# Altium PCB MB1367.PcbDoc (part 2 of 6)
Units mm, origin at the board's own origin, x right, y up, seen from the top; angles counter-clockwise.
Board outline 70 x 82.5 mm, 4 copper layers (Top Layer, Signal Layer 1, Signal Layer 2, Bottom Layer), stack 1.614 mm thick; 192 components, 143 nets, 810 pads, 920 vias.
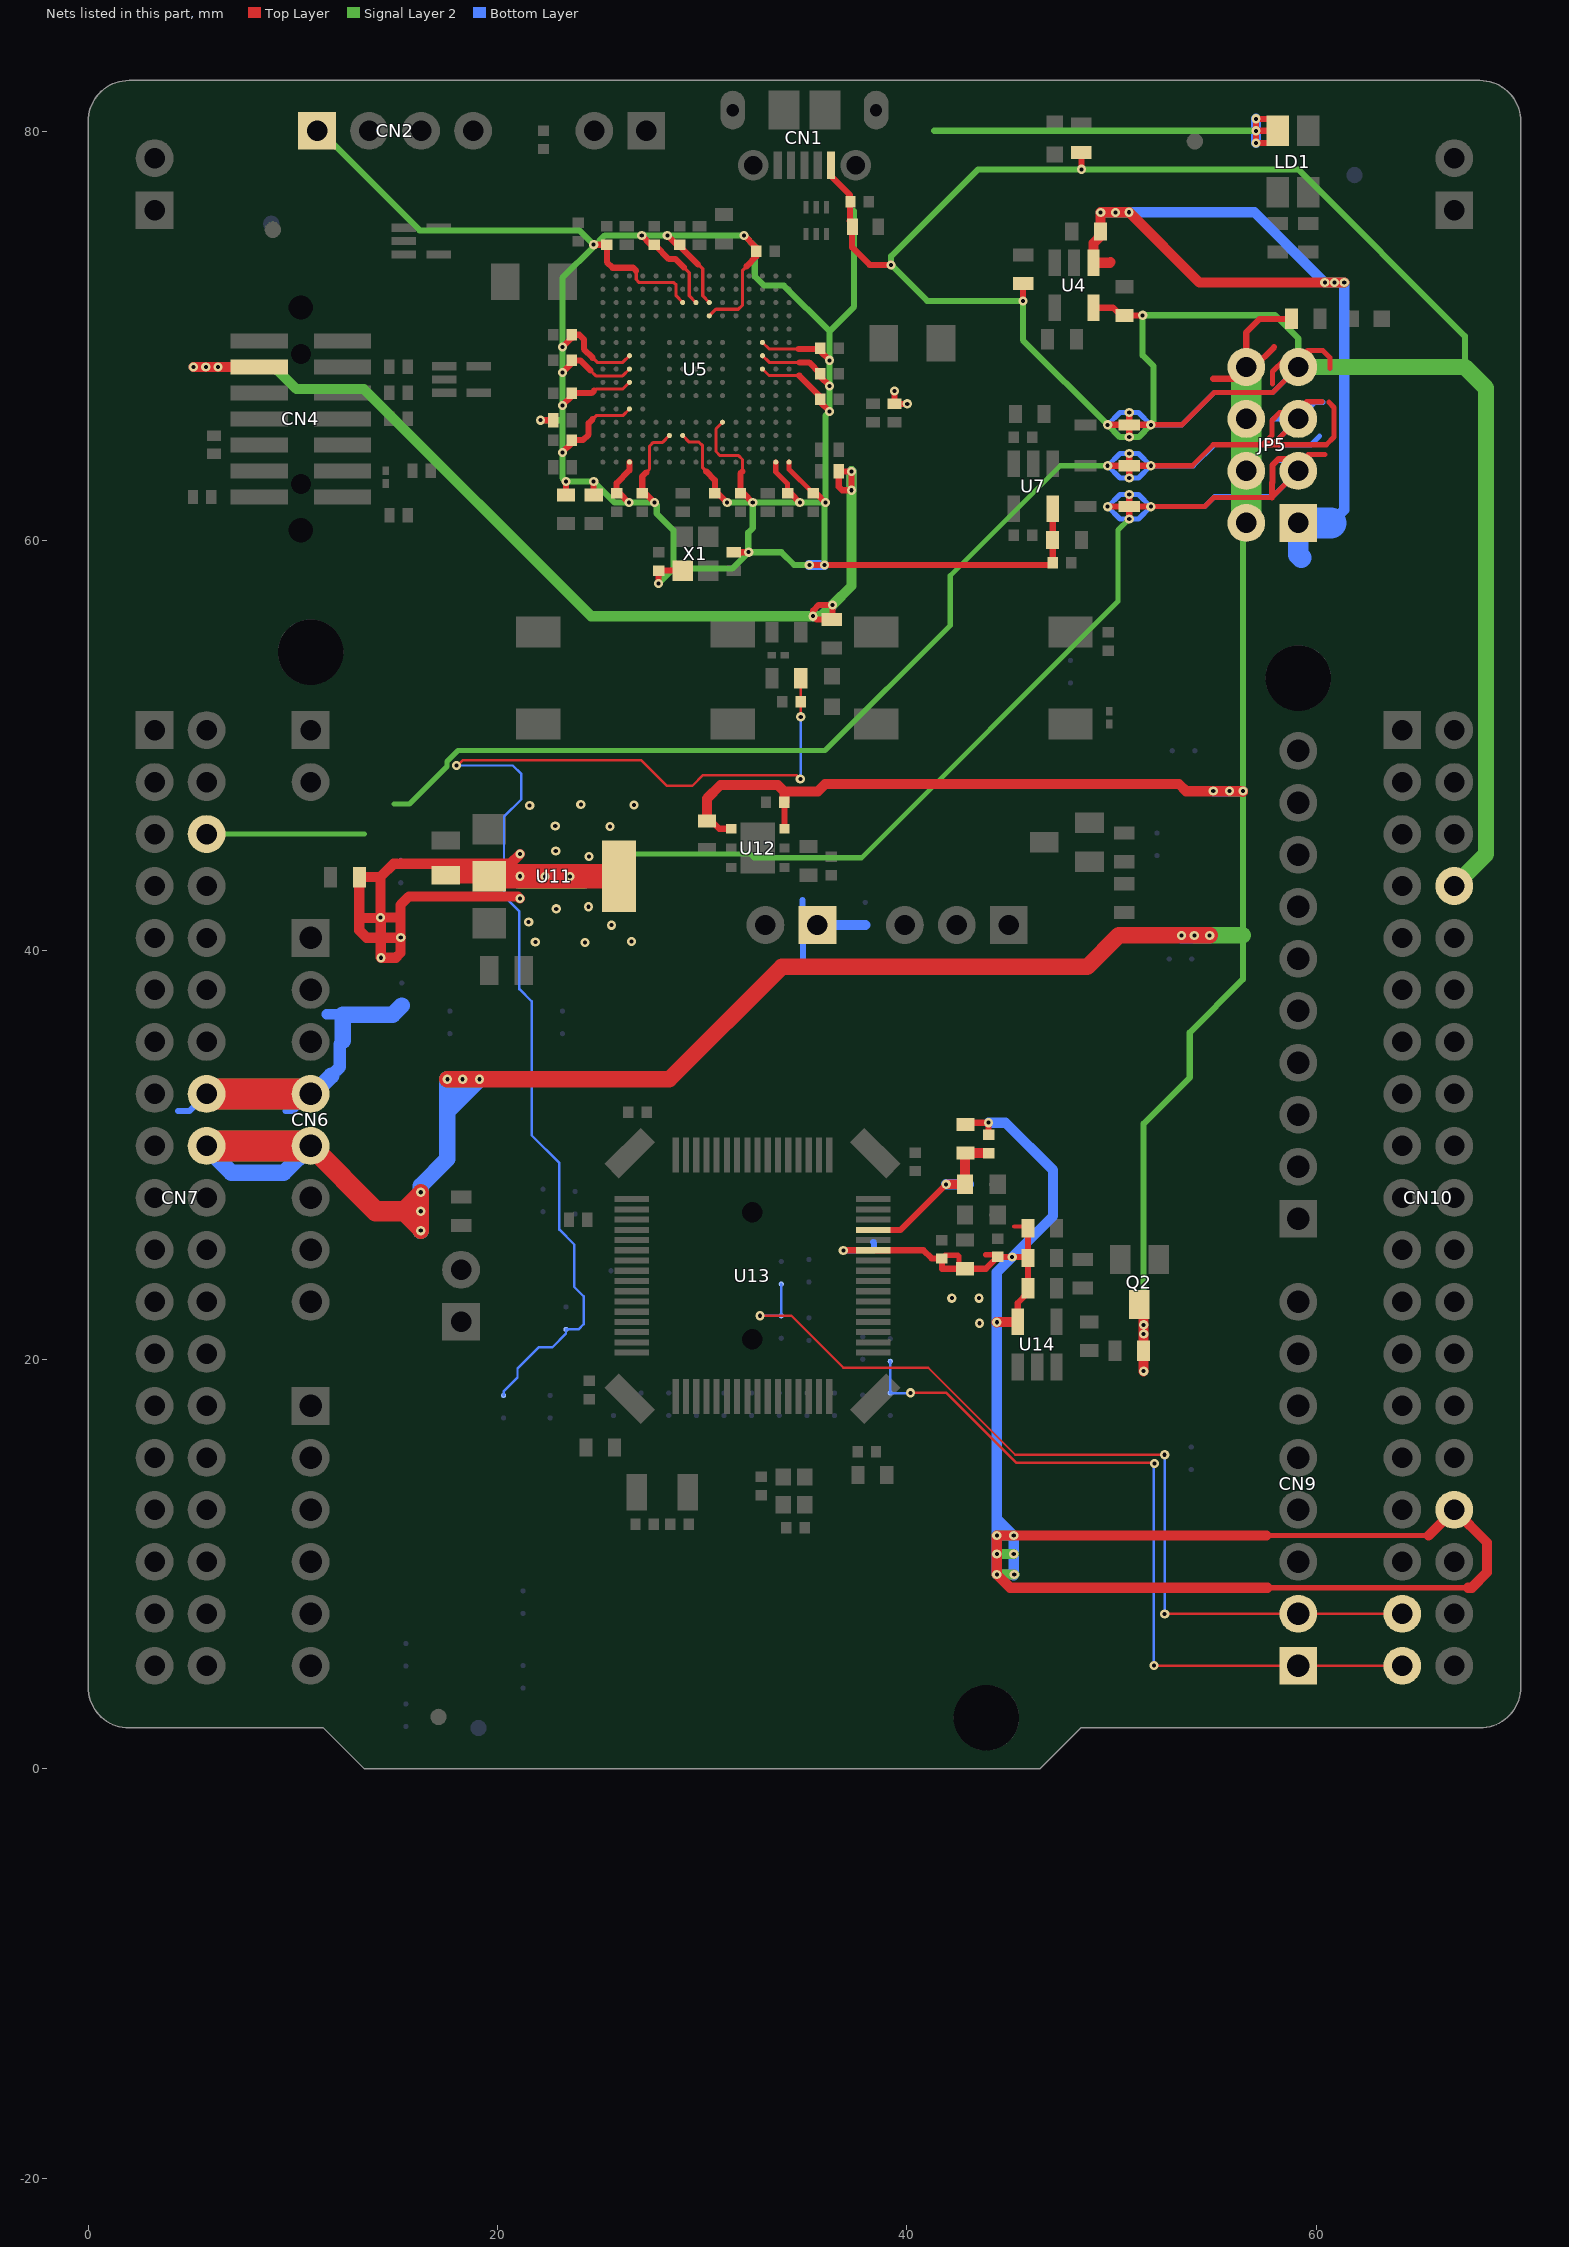
[diagram p4: the nets of this part, all layers, seen from the top]

## Part data
B1: library part MCD-00002, "Non-Open Push-Button 0.1A 24V", Manufacturer=WEALTHMETAL, Manufacturer_Part_Number=TD0341X-G01-BLU, ComponentLink1Description=Wealthmetal_Tact-Switch_TD0341.pdf, ComponentLink1URL=http://tunmcdsvn.tun.st.com/Component_Datasheet_Library/Trunk/Misc/Wealthmetal_Tact-Switch_TD0341, ECCN_EU=n/a, ECCN_US=n/a, Initial_Board_Reference=MB1274, Internal_Part_Number=MCD-00002, Order_Code_Farnell=535-930, Part_Type=Misc, Provided_By=Subcon, Status=Released
B2: library part MCD-00001, "Non-Open Push-Button 0.1A 24V", Manufacturer=WEALTHMETAL, Manufacturer_Part_Number=TD0341X-G01-BLA, ComponentLink1Description=Wealthmetal_Tact-Switch_TD0341.pdf, ComponentLink1URL=http://tunmcdsvn.tun.st.com/Component_Datasheet_Library/Trunk/Misc/Wealthmetal_Tact-Switch_TD0341, ECCN_EU=n/a, ECCN_US=n/a, Initial_Board_Reference=MB1274, Internal_Part_Number=MCD-00001, Order_Code_Farnell=535-930, Part_Type=Misc, Provided_By=Subcon, Status=Released
C1 C6 C7 C8 C9 C13 C14 C15 C16 C17 C18 C20 C21 C22 C23 C24 C25 C26 C27 C32 C33 C34 C35 C36 C40 C42 C44 C45 C47 C49 C52 C54: library part MCD-00102, "Capacitor, MLCC, 100nF, 16V, X7R, 10%, 0402, T=0,5mm", Manufacturer=YAGEO, Manufacturer_Part_Number=CC0402KRX7R7BB104, Package=C0402, ComponentLink1Description=Yageo_Capacitor_X7R-series.pdf, ComponentLink1URL=http://tunmcdsvn.tun.st.com/Component_Datasheet_Library/Trunk/Capacitors/Yageo_Multilayer_Capacitor_X7R_series_100pF_to_22uF, ECCN_EU=n/a, ECCN_US=n/a, Initial_Board_Reference=MB1262, Internal_Part_Number=MCD-00102, Part_Type=Capacitor, Provided_By=Subcon, Status=Released
C2: library part MCD-00205, "Capacitor, MLCC, 100pF, 50V, NPO, 5%, 0402, T=0,5mm", Manufacturer=YAGEO, Manufacturer_Part_Number=CC0402JRNPO9BN101, Package=C0402, ComponentLink1Description=Yageo_Capacitor_NP0_16V-to-50V.pdf, ComponentLink1URL=http://tunmcdsvn.tun.st.com/Component_Datasheet_Library/Trunk/Capacitors/Yageo_Capacitor_NP0_16V-to-50V, Internal_Part_Number=MCD-00205, Part_Type=Capacitor, Provided_By=Subcon, Status="Footprint available"
C3: library part MCD-00016, "Capacitor, MLCC, 20pF, 50V, NPO, 5%, 0402, T=0,5mm", Manufacturer=YAGEO, Manufacturer_Part_Number=CC0402JRNPO9BN200, Package=C0402, ComponentLink1Description=Yageo_Capacitor_NP0_16V-to-50V.pdf, ComponentLink1URL=http://tunmcdsvn.tun.st.com/Component_Datasheet_Library/Trunk/Capacitors/Yageo_Capacitor_NP0_16V-to-50V, ECCN_EU=n/a, ECCN_US=n/a, Initial_Board_Reference=MB1274, Internal_Part_Number=MCD-00016, Part_Type=Capacitor, Provided_By=Subcon, Status=Released
C4: library part MCD-00012, "Capacitor, MLCC, 2.2uF, 10V, X5R, 10%, 0603, T=0,8mm", Alternate_Manufacturer=KEMET, Alternate_Manufacturer_Part_Number=C0603C225K8PACTU, Manufacturer=YAGEO, Manufacturer_Part_Number=CC0603KRX5R6BB225, Package=C0603, ComponentLink1Description=Yageo_Capacitor_X5R-series.pdf, ComponentLink1URL=http://tunmcdsvn.tun.st.com/Component_Datasheet_Library/Trunk/Capacitors/Yageo_Multilayer_capacitor_X5R_series_100pF_to_100uF, ECCN_EU=n/a, ECCN_US=n/a, Initial_Board_Reference=MB1274, Internal_Part_Number=MCD-00012, Part_Type=Capacitor, Provided_By=Subcon, Status=Released
C5 C11 C19 C29 C31 C37 C39 C43 C48 C53: library part MCD-00010, "Capacitor, MLCC, 1uF, 16V, X5R, 10%, 0603, T=0,8mm", Manufacturer=YAGEO, Manufacturer_Part_Number=CC0603KRX5R7BB105, Package=C0603, ComponentLink1Description=Yageo_Capacitor_X5R-series.pdf, ComponentLink1URL=http://tunmcdsvn.tun.st.com/Component_Datasheet_Library/Trunk/Capacitors/Yageo_Multilayer_capacitor_X5R_series_100pF_to_100uF, ECCN_EU=n/a, ECCN_US=n/a, Initial_Board_Reference=MB1274, Internal_Part_Number=MCD-00010, Part_Type=Capacitor, Provided_By=Subcon, Status=Released
C10 C12: library part MCD-00008, "Capacitor, MLCC, 2.2uF, 16V, X7R, 10%, 1206, T=1,15mm", Alternate_Manufacturer=KEMET, Alternate_Manufacturer_Part_Number=C1206C225K4RAC, Manufacturer=YAGEO, Manufacturer_Part_Number=CC1206KKX7R7BB225, Package=C1206, ComponentLink1Description=Yageo_Capacitor_X7R-series.pdf, ComponentLink1URL=http://tunmcdsvn.tun.st.com/Component_Datasheet_Library/Trunk/Capacitors/Yageo_Multilayer_Capacitor_X7R_series_100pF_to_22uF, ECCN_EU=n/a, ECCN_US=n/a, Initial_Board_Reference=MB1274, Internal_Part_Number=MCD-00008, Part_Type=Capacitor, Provided_By=Subcon, Status=Released
C28 C55: library part MCD-00009, "Capacitor, MLCC, 4.7uF, 16V, X5R, 10%, 0603, T=0.8mm", Manufacturer=YAGEO, Manufacturer_Part_Number=CC0603KRX5R7BB475, Package=C0603, ComponentLink1Description=Yageo_Capacitor_X5R-series.pdf, ComponentLink1URL=http://tunmcdsvn.tun.st.com/Component_Datasheet_Library/Trunk/Capacitors/Yageo_Multilayer_capacitor_X5R_series_100pF_to_100uF, ECCN_EU=n/a, ECCN_US=n/a, Initial_Board_Reference=MB1274, Internal_Part_Number=MCD-00009, Part_Type=Capacitor, Provided_By=subcon, Status=Released
C30: library part MCD-00011, "Capacitor, MLCC, 10nF, 16V, X7R, 10%, 0402, T=0.5mm", Manufacturer=YAGEO, Manufacturer_Part_Number=CC0402KRX7R7BB103, Package=C0402, ComponentLink1Description=Yageo_Capacitor_X7R-series.pdf, ComponentLink1URL=http://tunmcdsvn.tun.st.com/Component_Datasheet_Library/Trunk/Capacitors/Yageo_Multilayer_Capacitor_X7R_series_100pF_to_22uF, ECCN_EU=n/a, ECCN_US=n/a, Initial_Board_Reference=MB1274, Internal_Part_Number=MCD-00011, Part_Type=Capacitor, Provided_By=Subcon, Status=Released
C38 C41: library part MCD-00014, "Capacitor, MLCC, 10uF, 25V, X5R, 10%, 0805, T=0,85mm", Manufacturer=YAGEO, Manufacturer_Part_Number=CC0805KRX5R8BB106, Package=C0805, ComponentLink1Description=Yageo_Capacitor_X5R-series.pdf, ComponentLink1URL=http://tunmcdsvn.tun.st.com/Component_Datasheet_Library/Trunk/Capacitors/Yageo_Multilayer_capacitor_X5R_series_100pF_to_100uF, ECCN_EU=n/a, ECCN_US=n/a, Initial_Board_Reference=MB1274, Internal_Part_Number=MCD-00014, Part_Type=Capacitor, Provided_By=Subcon, Status=Released
C46: library part MCD-01124, "Capacitor, MLCC, 10µF, 10V, X5R, 10%, 0603, T=0.8mm", Manufacturer=MURATA, Manufacturer_Part_Number=GRM188R61A106KAAL, Package=C0603, ComponentLink1Description=Murata_Capacitor_GRM188R61A106KAAL.pdf, ComponentLink1URL=http://tunmcdsvn.tun.st.com/Component_Datasheet_Library/Trunk/Capacitors/Murata_Capacitor_GR_series, ECCN_EU=NEC, ECCN_US=EAR99, Initial_Board_Reference=MB1361, Internal_Part_Number=MCD-01124, Part_Type=Capacitor, Provided_By=Subcon, Status="Footprint available"
C50: library part MCD-00211, "Capacitor, MLCC, 100nF, 16V, X7R, 10%, 0603, T=0,8mm", Manufacturer=YAGEO, Manufacturer_Part_Number=CC0603KRX7R7BB104, Package=C0603, ComponentLink1Description=Yageo_Capacitor_X7R-series.pdf, ComponentLink1URL=http://tunmcdsvn.tun.st.com/Component_Datasheet_Library/Trunk/Capacitors/Yageo_Multilayer_Capacitor_X7R_series_100pF_to_22uF, ECCN_EU=n/a, ECCN_US=n/a, Initial_Board_Reference=MB1319, Internal_Part_Number=MCD-00211, Part_Type=Capacitor, Provided_By=Subcon, Status=Released
C51: library part MCD-01101, "Capacitor,100pF,50V,X7R,10%,0603", Manufacturer=AVX, Manufacturer_Part_Number=06035C101JAT4A, Package=C0603, ComponentLink1Description=AVX_X7R-series.pdf, ComponentLink1URL=http://tunmcdsvn.tun.st.com/Component_Datasheet_Library/Trunk/Capacitors/AVX_Capacitor_X7R-series/AVX_X7R-series.pdf, ECCN_EU=n/a, ECCN_US=n/a, Initial_Board_Reference=MB1381, Internal_Part_Number=MCD-01101, Part_Type=Capacitor, Provided_By=Subcon, Status="Footprint available"
C56 C59: library part MCD-00674, "Capacitor, MLCC, 6.8pF, 50V, NPO, +-0.25pF, 0402, T=0.5mm", Manufacturer=YAGEO, Manufacturer_Part_Number=CC0402CRNPO9BN6R8, Package=C0402, ComponentLink1Description=Yageo_Capacitor_NP0_16V-to-50V.pdf, ComponentLink1URL=http://tunmcdsvn.tun.st.com/Component_Datasheet_Library/Trunk/Capacitors/Yageo_Capacitor_NP0_16V-to-50V, ECCN_EU=n/a, ECCN_US=n/a, Initial_Board_Reference=MB1319, Internal_Part_Number=MCD-00674, Part_Type=Capacitor, Provided_By=Subcon, Status=Released
C57 C58: library part MCD-00003, "Capacitor, MLCC, 5.1pF, 50V, NPO, +-0.25pF, 0402, T=0.5mm", Manufacturer=YAGEO, Manufacturer_Part_Number=CC0402CRNPO9BN5R1, Package=C0402, ComponentLink1Description=Yageo_Capacitor_NP0_16V-to-50V.pdf, ComponentLink1URL=http://tunmcdsvn.tun.st.com/Component_Datasheet_Library/Trunk/Capacitors/Yageo_Capacitor_NP0_16V-to-50V, ECCN_EU=n/a, ECCN_US=n/a, Initial_Board_Reference=MB1274, Internal_Part_Number=MCD-00003, Part_Type=Capacitor, Provided_By=Subcon, Status=Released
CN1: library part MCD-00028, "USB-MICRO-B, 0.65mm, RA, SMT, Bottom Mount,", Manufacturer=MOLEX, Manufacturer_Part_Number=1050170001, ComponentLink1Description=Molex_Connector-USB-microB_105017-0001.pdf, ComponentLink1URL=http://tunmcdsvn.tun.st.com/Component_Datasheet_Library/Trunk/Connectors/Molex_Connector-USB-microB_105017-0001, ECCN_EU=n/a, ECCN_US=n/a, Initial_Board_Reference=MB1274, Internal_Part_Number=MCD-00028, Part_Type=Connector, Provided_By=Subcon, Status=Released
CN2: library part MCD-00029, "Header, 4x1, 2,54mm, VR, TH, Height 5.84mm/2.54mm", Manufacturer=SAMTEC, Manufacturer_Part_Number=TSW-104-07-x-S, ComponentLink1Description=Samtec_connector_TSW-HTSW-series.pdf, ComponentLink1URL=http://tunmcdsvn.tun.st.com/Component_Datasheet_Library/Trunk/Connectors/Samtec_TSW-HTSW-series, ECCN_EU=n/a, ECCN_US=n/a, Initial_Board_Reference=MB1274, Internal_Part_Number=MCD-00029, Part_Type=Connector, Provided_By=Subcon, Status=Released
CN4: library part MCD-01226, "Header 5x2, 1.27mm, Dual row, Straight, Surface mount, vertical male connector. 3.05mm lead. Mates with FFSD connector. Footprint compatible with FTSH-107-01-L-DV,-K,-A,-P,-ES (STDC14 MEDIUM)", Manufacturer=SAMTEC, Manufacturer_Part_Number=FTSH-105-01-L-DV-K, ComponentLink1Description=Datasheet, ComponentLink1URL=http://tunmcdsvn.tun.st.com/Component_Datasheet_Library/Trunk/Connectors/Samtec_FTSH_smt_series, Internal_Part_Number=MCD-01226, Part_Type=Connector, Provided_By=SUBCO, Status=Released
CN5: library part MCD-00262, "Socket, 10x1, 2.54mm, VR, TH, Height 8.51mm/10mm", Manufacturer=SAMTEC, Manufacturer_Part_Number=SSW-110-03-x-S, ComponentLink1Description=Samtec_SSW-SSQ-series.pdf, ComponentLink1URL=http://tunmcdsvn.tun.st.com/Component_Datasheet_Library/Trunk/Connectors/Samtec_SSW-SSQ-series, ECCN_EU=n/a, ECCN_US=n/a, Initial_Board_Reference=MB1319, Internal_Part_Number=MCD-00262, Part_Type=Connector, Provided_By=Subcon, Status=Released
CN6 CN9: library part MCD-00261, "Socket, 8x1, 2.54mm, VR, TH, Height 8.51mm/10mm", Manufacturer=SAMTEC, Manufacturer_Part_Number=SSW-108-03-x-S, ComponentLink1Description=Samtec_SSW-SSQ-series.pdf, ComponentLink1URL=http://tunmcdsvn.tun.st.com/Component_Datasheet_Library/Trunk/Connectors/Samtec_SSW-SSQ-series, ECCN_EU=n/a, ECCN_US=n/a, Initial_Board_Reference=MB1319, Internal_Part_Number=MCD-00261, Part_Type=Connector, Provided_By=Subcon, Status=Released
CN7 CN10: library part MCD-00213, "Header, 19x2, 2,54mm, VR, TH, Height 5.84mm/10.16mm", Manufacturer=SAMTEC, Manufacturer_Part_Number=TSW-119-09-x-D, ComponentLink1Description=Samtec_connector_TSW-HTSW-series.pdf, ComponentLink1URL=http://tunmcdsvn.tun.st.com/Component_Datasheet_Library/Trunk/Connectors/Samtec_TSW-HTSW-series, ECCN_EU=n/a, ECCN_US=n/a, Initial_Board_Reference=MB1319, Internal_Part_Number=MCD-00213, Part_Type=Connector, Provided_By=Subcon, Status=Released
CN8: library part MCD-00260, "Socket, 6x1, 2.54mm, VR, TH, Height 8.51mm/10mm", Manufacturer=SAMTEC, Manufacturer_Part_Number=SSW-106-03-x-S, ComponentLink1Description=Samtec_SSW-SSQ-series.pdf, ComponentLink1URL=http://tunmcdsvn.tun.st.com/Component_Datasheet_Library/Trunk/Connectors/Samtec_SSW-SSQ-series, ECCN_EU=n/a, ECCN_US=n/a, Initial_Board_Reference=MB1319, Internal_Part_Number=MCD-00260, Part_Type=Connector, Provided_By=Subcon, Status=Released
CN11 CN12: library part MCD-00214, "Header, 2x1, 2,54mm, VR, TH, Height 5.84mm/10.16mm", Manufacturer=SAMTEC, Manufacturer_Part_Number=TSW-102-09-x-S, ComponentLink1Description=Samtec_connector_TSW-HTSW-series.pdf, ComponentLink1URL=http://tunmcdsvn.tun.st.com/Component_Datasheet_Library/Trunk/Connectors/Samtec_TSW-HTSW-series, ECCN_EU=n/a, ECCN_US=n/a, Initial_Board_Reference=MB1319, Internal_Part_Number=MCD-00214, Part_Type=Connector, Provided_By=Subcon, Status=Released
D1 D2 D3: library part MCD-00034, "BAT60JFILM", Manufacturer=STMICROELECTRONICS, ComponentLink1Description=STM_Diode_BAT60JFILM-SOD323.pdf, ComponentLink1URL=http://tunmcdsvn.tun.st.com/Component_Datasheet_Library/Trunk/Diodes/STM_Diode_BAT60JFILM-SOD323, ECCN_EU=NEC, ECCN_US=EAR99, Initial_Board_Reference=MB1274, Internal_Part_Number=MCD-00034, Manufacturer_Part_Number=BAT60JFILM, Part_Type=Diode, Provided_By=Subcon, Status=Released
HW104: library part MCD-00626, "\"CE\" logo footprint for PCB", ECCN_EU=n/a, ECCN_US=n/a, Initial_Board_Reference=MB1331, Internal_Part_Number=MCD-00626, Part_Type=Mechanical, Provided_By=n/a, Status=Released
HW106: library part MCD-00625, "\"STMicroelectronics\" logo footprint for PCB", Manufacturer=n/a, ComponentLink1Description=n/a, ComponentLink1URL=http://na, ECCN_EU=n/a, ECCN_US=n/a, Initial_Board_Reference=MB1331, Internal_Part_Number=MCD-00625, Manufacturer_Part_Number=n/a, Part_Type=Mechanical, Provided_By=n/a, Status=Released
HW107: library part MCD-00627, "\"Hand\" ESD logo footprint for PCB", Manufacturer=n/a, ComponentLink1Description=n/a, ComponentLink1URL=http://na, ECCN_EU=n/a, ECCN_US=n/a, Initial_Board_Reference=MB1331, Internal_Part_Number=MCD-00627, Manufacturer_Part_Number=n/a, Part_Type=Mechanical, Provided_By=n/a, Status=Released
JP1 JP7: library part MCD-00045, "Header, 2x1, 2,54mm, VR, TH, Height 5.84mm/2.54mm", Manufacturer=SAMTEC, Manufacturer_Part_Number=TSW-102-07-x-S, ComponentLink1Description=Samtec_connector_TSW-HTSW-series.pdf, ComponentLink1URL=http://tunmcdsvn.tun.st.com/Component_Datasheet_Library/Trunk/Connectors/Samtec_TSW-HTSW-series, ECCN_EU=n/a, ECCN_US=n/a, Initial_Board_Reference=MB1274, Internal_Part_Number=MCD-00045, Part_Type=Connector, Provided_By=Subcon, Status=Released
JP3 JP6: library part MCD-00683, "Header, 2x1, 2,54mm, VR, TH, Height 5.84mm/2.54mm - Shunt Fitted by default", Manufacturer=SAMTEC, Manufacturer_Part_Number=TSW-102-07-x-S, ComponentLink1Description=Samtec_connector_TSW-HTSW-series.pdf, ComponentLink1URL=http://tunmcdsvn.tun.st.com/Component_Datasheet_Library/Trunk/Connectors/Samtec_TSW-HTSW-series, ECCN_EU=n/a, ECCN_US=n/a, Initial_Board_Reference=MB1331, Internal_Part_Number=MCD-00683, Part_Type=Connector, Provided_By=Subcon, Status=Released
JP5: library part MCD-00686, "Header, 4x2, 2,54mm, VR, TH, Height 5.84mm/2.54mm - Shunt Fitted 1-2", Manufacturer=SAMTEC, Manufacturer_Part_Number=TSW-104-07-x-D, ComponentLink1Description=Samtec_TSW-HTSW-series.pdf, ComponentLink1URL=http://tunmcdsvn.tun.st.com/Component_Datasheet_Library/Trunk/Connectors/Samtec_TSW-HTSW-series, ECCN_EU=n/a, ECCN_US=n/a, Initial_Board_Reference=MB1331, Internal_Part_Number=MCD-00686, Part_Type=Connector, Provided_By=Subcon, Status="Symbol available"
JP8: library part MCD-00684, "Header, 3x1, 2,54mm, VR, TH, Height 5.84mm/2.54mm - Shunt Fitted 1-2 by default", Manufacturer=SAMTEC, Manufacturer_Part_Number=TSW-103-07-F-S, ComponentLink1Description=Samtec_connector_TSW-HTSW-series.pdf, ComponentLink1URL=http://tunmcdsvn.tun.st.com/Component_Datasheet_Library/Trunk/Connectors/Samtec_TSW-HTSW-series, ECCN_EU=n/a, ECCN_US=n/a, Initial_Board_Reference=MB1331, Internal_Part_Number=MCD-00684, Part_Type=Connector, Provided_By=Subcon, Status=Released
L1 L2: library part MCD-00047, "SMD Chip ferrite bead, 600R@100MHz +/-25%, 350mA, 500mohm DC, 0603, T=0.8mm", Manufacturer=TAI-TECH, Manufacturer_Part_Number=FCM1608KF-601T03, ComponentLink1Description=TaiTech_Bead_FCM1608_series.pdf, ComponentLink1URL=http://tunmcdsvn.tun.st.com/Component_Datasheet_Library/Trunk/Inductors/TaiTech_Bead_FCM1608_series, ECCN_EU=n/a, ECCN_US=n/a, Initial_Board_Reference=MB1274, Internal_Part_Number=MCD-00047, Part_Type=Inductor, Provided_By=Subcon, Status=Released
LD1: library part MCD-00051, "LED Bicolor", Alternate_Manufacturer=EVERLUCK, Alternate_Manufacturer_Part_Number=LE-RGW35280, Manufacturer="AVAGO TECHNOLOGIES", Manufacturer_Part_Number=HSMF-A201-A00J1, ComponentLink1Description=Avago_LED-SMC_HSMx-A2xx-02Feb2012.pdf, ComponentLink1URL=http://tunmcdsvn.tun.st.com/Component_Datasheet_Library/Trunk/display/Avago_LED-SMC_HSMx-A2xx-02Feb2012, ECCN_EU=NEC, ECCN_US=EAR99, Initial_Board_Reference=MB1274, Internal_Part_Number=MCD-00051, Part_Type=Display, Provided_By=Subcon, Status=Released
LD2 LD3: library part MCD-00050, "LED, Green, 0603", Manufacturer=EVERLIGHT, Manufacturer_Part_Number=19-213SYGC/S530-E2/TR8, Package="LED 0603", ComponentLink1Description=Everlight_SMD-LED-GREEN_19-213SYGC-S530-XX-TR8-v3.doc.pdf, ComponentLink1URL=http://tunmcdsvn.tun.st.com/Component_Datasheet_Library/Trunk/display/Everlight_SMD-LED-GREEN_19-213SYGC-S530-XX-TR8-v3.doc, ECCN_EU=NEC, ECCN_US=EAR99, Initial_Board_Reference=MB1274, Internal_Part_Number=MCD-00050, Part_Type=Display, Provided_By=Subcon, Status=Released
LD4: library part MCD-00049, "LED, Red, 0603", Manufacturer=EVERLIGHT, Manufacturer_Part_Number=19-213-R6C-AP1Q2B/3T, Package="LED 0603", ComponentLink1Description=Everlight_SMD-LED-RED_19-213-R6C-AP1Q2B-3T-V3.doc.pdf, ComponentLink1URL=http://tunmcdsvn.tun.st.com/Component_Datasheet_Library/Trunk/display/Everlight_SMD-LED-RED_19-213-R6C-AP1Q2B-3T-V3.doc, ECCN_EU=NEC, ECCN_US=EAR99, Initial_Board_Reference=MB1274, Internal_Part_Number=MCD-00049, Part_Type=Display, Provided_By=Subcon, Status=Released
Q1 Q2: library part MCD-00073, "NPN Bipolar Transistor", Manufacturer=NXP, Manufacturer_Part_Number=BSR14, ComponentLink1Description=NXP_Transistor_BSR14.pdf, ComponentLink1URL=http://tunmcdsvn.tun.st.com/Component_Datasheet_Library/Trunk/IC/NXP_Transistor_BSR14, ECCN_EU=NEC, ECCN_US=EAR99, Initial_Board_Reference=MB1274, Internal_Part_Number=MCD-00073, Part_Type=IC, Provided_By=Subcon, Status=Released
R1 R30: library part MCD-00070, "Resistor,1K,0603,1%,1/10W", Manufacturer=YAGEO, Manufacturer_Part_Number=RC0603FR-071KL, Package=R0603, ComponentLink1Description=Yageo_Resistor_RC0603-series.pdf, ComponentLink1URL=http://tunmcdsvn.tun.st.com/Component_Datasheet_Library/Trunk/Resistors/Yageo_Resistor_RC0603-series, ECCN_EU=n/a, ECCN_US=n/a, Initial_Board_Reference=MB1274, Internal_Part_Number=MCD-00070, Part_Type=Resistor, Provided_By=Subcon, Status=Released
R2 R3 R27: library part MCD-00197, "Resistor,330R,0603,1%,1/10W", Manufacturer=YAGEO, Manufacturer_Part_Number=RC0603FR-07330RL, Package=R0603, ComponentLink1Description=Yageo_Resistor_RC0603-series.pdf, ComponentLink1URL=http://tunmcdsvn.tun.st.com/Component_Datasheet_Library/Trunk/Resistors/Yageo_Resistor_RC0603-series, ECCN_EU=n/a, ECCN_US=n/a, Internal_Part_Number=MCD-00197, Part_Type=Resistor, Provided_By=Subcon, Status=Released
R4 R15 R20: library part MCD-00119, "Resistor,100R,0402,1%,1/16W", Manufacturer=YAGEO, Manufacturer_Part_Number=RC0402FR-07100RL, Package=R0402, ComponentLink1Description=Yageo_Resistor_RC0402-series.pdf, ComponentLink1URL=http://tunmcdsvn.tun.st.com/Component_Datasheet_Library/Trunk/Resistors/Yageo_Resistor_RC0402-series, ECCN_EU=n/a, ECCN_US=n/a, Initial_Board_Reference=MB1262, Internal_Part_Number=MCD-00119, Part_Type=Resistor, Provided_By=Subcon, Status=Released
R5: library part MCD-00185, "Resistor,3K,0402,1%,1/16W", Manufacturer=YAGEO, Manufacturer_Part_Number=RC0402FR-073KL, Package=R0402, ComponentLink1Description=Yageo_Resistor_RC0402-series.pdf, ComponentLink1URL=http://tunmcdsvn.tun.st.com/Component_Datasheet_Library/Trunk/Resistors/Yageo_Resistor_RC0402-series, ECCN_EU=n/a, ECCN_US=n/a, Internal_Part_Number=MCD-00185, Part_Type=Resistor, Provided_By=Subcon, Status=Released
R6 R26 R28: library part MCD-00223, "Resistor,100K,0603,1%,1/10W", Manufacturer=YAGEO, Manufacturer_Part_Number=RC0603FR-07100KL, Package=R0603, ComponentLink1Description=Yageo_Resistor_RC0603-series.pdf, ComponentLink1URL=http://tunmcdsvn.tun.st.com/Component_Datasheet_Library/Trunk/Resistors/Yageo_Resistor_RC0603-series, ECCN_EU=n/a, ECCN_US=n/a, Initial_Board_Reference=MB1319, Internal_Part_Number=MCD-00223, Part_Type=Resistor, Provided_By=Subcon, Status=Released
R7 R25: library part MCD-00225, "Resistor,510R,0603,1%,1/10W", Manufacturer=YAGEO, Manufacturer_Part_Number=RC0603FR-07510RL, Package=R0603, ComponentLink1Description=Yageo_Resistor_RC0603-series.pdf, ComponentLink1URL=http://tunmcdsvn.tun.st.com/Component_Datasheet_Library/Trunk/Resistors/Yageo_Resistor_RC0603-series, ECCN_EU=n/a, ECCN_US=n/a, Initial_Board_Reference=MB1319, Internal_Part_Number=MCD-00225, Part_Type=Resistor, Provided_By=Subcon, Status=Released
R8 R31: library part MCD-00220, "Resistor,10K,0603,1%,1/10W", Manufacturer=YAGEO, Manufacturer_Part_Number=RC0603FR-0710KL, Package=R0603, ComponentLink1Description=Yageo_Resistor_RC0603-series.pdf, ComponentLink1URL=http://tunmcdsvn.tun.st.com/Component_Datasheet_Library/Trunk/Resistors/Yageo_Resistor_RC0603-series, ECCN_EU=n/a, ECCN_US=n/a, Initial_Board_Reference=MB1319, Internal_Part_Number=MCD-00220, Part_Type=Resistor, Provided_By=Subcon, Status=Released
R9 R10 R13 R18 R22 R23: library part MCD-00481, "Resistor,47R,0402,1%,1/16W", Manufacturer=YAGEO, Manufacturer_Part_Number=RC0402FR-0747RL, Package=R0402, ComponentLink1Description=Datasheet, ComponentLink1URL=http://tunmcdsvn.tun.st.com/Component_Datasheet_Library/Trunk/Resistors/Yageo_Resistor_RC0402-series, Internal_Part_Number=MCD-00481, Part_Type=Resistor, Provided_By=SUBCO, Status=Released
R11 R16 R19: library part MCD-00065, "Resistor,4K7,0402,1%,1/16W", Alternate_Manufacturer=YAGEO, Alternate_Manufacturer_Part_Number=RT0402FRE074K7L, Manufacturer_Part_Number=RC0402FR-074K7L, Package=R0402, ComponentLink1Description=Yageo_Resistor_RC0402-series.pdf, ComponentLink1URL=http://tunmcdsvn.tun.st.com/Component_Datasheet_Library/Trunk/Resistors/Yageo_Resistor_RC0402-series, ECCN_EU=n/a, ECCN_US=n/a, Initial_Board_Reference=MB1274, Internal_Part_Number=MCD-00065, Manufacturer=YAGEO, Part_Type=Resistor, Provided_By=Subcon, Status=Released
R12: library part MCD-00055, "Resistor,2K7,0402,1%,1/16W", Manufacturer=YAGEO, Manufacturer_Part_Number=RC0402FR-072K7L, Package=R0402, ComponentLink1Description=Yageo_Resistor_RC0402-series.pdf, ComponentLink1URL=http://tunmcdsvn.tun.st.com/Component_Datasheet_Library/Trunk/Resistors/Yageo_Resistor_RC0402-series, ECCN_EU=n/a, ECCN_US=n/a, Initial_Board_Reference=MB1274, Internal_Part_Number=MCD-00055, Part_Type=Resistor, Provided_By=Subcon, Status=Released
R14 R17 R21 R24: library part MCD-00053, "Resistor,10K,0402,1%,1/16W", Manufacturer=YAGEO, Manufacturer_Part_Number=RC0402FR-0710KL, Package=R0402, ComponentLink1Description=Yageo_Resistor_RC0402-series.pdf, ComponentLink1URL=http://tunmcdsvn.tun.st.com/Component_Datasheet_Library/Trunk/Resistors/Yageo_Resistor_RC0402-series, ECCN_EU=n/a, ECCN_US=n/a, Initial_Board_Reference=MB1274, Internal_Part_Number=MCD-00053, Part_Type=Resistor, Provided_By=subcon, Status=Released
R29: library part MCD-00222, "Resistor,47K,0603,1%,1/10W", Manufacturer=YAGEO, Manufacturer_Part_Number=RC0603FR-0747KL, Package=R0603, ComponentLink1Description=Yageo_Resistor_RC0603-series.pdf, ComponentLink1URL=http://tunmcdsvn.tun.st.com/Component_Datasheet_Library/Trunk/Resistors/Yageo_Resistor_RC0603-series, ECCN_EU=n/a, ECCN_US=n/a, Initial_Board_Reference=MB1319, Internal_Part_Number=MCD-00222, Part_Type=Resistor, Provided_By=Subcon, Status=Released
R32: library part MCD-00189, "Resistor,22R,0402,1%,1/16W", Manufacturer=YAGEO, Manufacturer_Part_Number=RC0402FR-0722RL, Package=R0402, ComponentLink1Description=Yageo_Resistor_RC0402-series.pdf, ComponentLink1URL=http://tunmcdsvn.tun.st.com/Component_Datasheet_Library/Trunk/Resistors/Yageo_Resistor_RC0402-series, ECCN_EU=n/a, ECCN_US=n/a, Internal_Part_Number=MCD-00189, Part_Type=Resistor, Provided_By=Subcon, Status=Released
R33: library part MCD-01215, "resistor, 10K, 0603, 0.5%, 1/10W", Manufacturer=YAGEO, Manufacturer_Part_Number=RC0603DR-0710KL, Package=R0603, ComponentLink1Description=RC_Group_51_RoHS_L_7.pdf, ComponentLink1URL=http://tunmcdsvn.tun.st.com/Component_Datasheet_Library/Trunk/Resistors/Yageo_Resistor_RC0603-series/RC_Group_51_RoHS_L_7.pdf, ECCN_EU=NA, ECCN_US=NA, Initial_Board_Reference=MB1367, Internal_Part_Number=MCD-01215, Part_Type=Resistor, Provided_By=Subcon, Status=Checked
R34: library part MCD-01209, "Resistor,33K,0603,0.5%,1/10W", Manufacturer=YAGEO, Manufacturer_Part_Number=RC0603DR-0733KL, Package=R0603, ComponentLink1Description=RC_Group_51_RoHS_L_7.pdf, ComponentLink1URL=http://tunmcdsvn.tun.st.com/Component_Datasheet_Library/Trunk/Resistors/Yageo_Resistor_RC0603-series/RC_Group_51_RoHS_L_7.pdf, ECCN_EU=n/a, ECCN_US=n/a, Initial_Board_Reference=MB1367, Internal_Part_Number=MCD-01209, Part_Type=Resistor, Provided_By=Subcon, Status=Checked
R35: library part MCD-00528, "Resistor,820R,0603,1%,1/10W", Manufacturer=YAGEO, Manufacturer_Part_Number=RC0603FR-07820RL, Package=R0603, ComponentLink1Description=Yageo_Resistor_RC0603-series.pdf, ComponentLink1URL=http://tunmcdsvn.tun.st.com/Component_Datasheet_Library/Trunk/Resistors/Yageo_Resistor_RC0603-series, ECCN_EU=n/a, ECCN_US=n/a, Internal_Part_Number=MCD-00528, Part_Type=Resistor, Provided_By=Subcon, Status=Released
SB1 SB2 SB3 SB4 SB5 SB6 SB7 SB8 SB9 SB10 SB11 SB12 SB13 SB14 SB15 SB16 SB17 SB18 SB19 SB20 SB21 SB22 SB23 SB24 SB25 SB26 SB27 SB28 SB29 SB30 SB31 SB32 SB33 SB34 SB35 SB36 SB37 SB38 SB39 SB40 SB41: library part MCD-00071, "Solder Bridge ON", ECCN_EU=n/a, ECCN_US=n/a, Initial_Board_Reference=MB1274, Internal_Part_Number=MCD-00071, Part_Type=Mechanical, Provided_By=Subcon, Status=Released
U1 U6: library part MCD-00136, "Dual Transil array for ESD protection", Manufacturer=STMICROELECTRONICS, Manufacturer_Part_Number=ESDALC6V1W5, ComponentLink1Description=STM_ESD_ESDALC6V1W5.pdf, ComponentLink1URL=http://tunmcdsvn.tun.st.com/Component_Datasheet_Library/Trunk/Diodes/STM_ESD_ESDALC6V1W5, ECCN_EU=NEC, ECCN_US=EAR99, Initial_Board_Reference=MB1262, Internal_Part_Number=MCD-00136, Part_Type=Diode, Provided_By=Subcon, Status=Released
U2: library part MCD-00649, "Common mode filter with ESD protection for USB 2.0 interface", Manufacturer=STMICROELECTRONICS, Manufacturer_Part_Number=ECMF02-2AMX6, ComponentLink1Description=STM_ESD_ECMF02-2AMX6.pdf, ComponentLink1URL=http://tunmcdsvn.tun.st.com/Component_Datasheet_Library/Trunk/Diodes/STM_ESD_ECMF02-2AMX6, ECCN_EU=NEC, ECCN_US=EAR99, Initial_Board_Reference=MB1248, Internal_Part_Number=MCD-00649, Part_Type=Diode, Provided_By=Subcon, Status="Footprint available"
U3: library part MCD-00251, "High power transient voltage suppressor, 7V breakdown", Manufacturer=STMICROELECTRONICS, Manufacturer_Part_Number=ESDA7P60-1U1M, ComponentLink1Description=STM_ESD_ESDA7P60-1U1M.pdf, ComponentLink1URL=http://tunmcdsvn.tun.st.com/Component_Datasheet_Library/Trunk/Diodes/STM_ESD_ESDA7P60-1U1M, ECCN_EU=NEC, ECCN_US=EAR99, Initial_Board_Reference=MB1311, Internal_Part_Number=MCD-00251, Part_Type=IC, Provided_By=Subcon, Status=Released
U4: library part MCD-00159, "500mA, Enhanced single channel power switches with active high enable pin", Alternate_Manufacturer="TEXAS INSTRUMENTS", Alternate_Manufacturer_Part_Number=TPS2051C, Manufacturer=STMICROELECTRONICS, Manufacturer_Part_Number=STMPS2151STR, ComponentLink1Description=STM_PWR-Switch_STMPS2151STR.pdf, ComponentLink1URL=http://tunmcdsvn.tun.st.com/Component_Datasheet_Library/Trunk/IC/STM_PWR-Switch_STMPS2151STR, ECCN_EU=NEC, ECCN_US=EAR99, Initial_Board_Reference=MB1264, Internal_Part_Number=MCD-00159, Part_Type=IC, Provided_By=Subcon, Status="Footprint available"
U5: library part MCD-00596, "STM32F723IEK  (STM32F7) BGA176", Manufacturer=STMICROELECTRONICS, Manufacturer_Part_Number=STM32F723IEK6, BMS_Part_Number=9175300, ComponentLink1Description=Datasheet, ComponentLink1URL=http://tunmcdsvn.tun.st.com/Component_Datasheet_Library/Trunk/IC/BGA176+25L_10x10x0.6_pitch0.65, Internal_Part_Number=MCD-00596, Part_Type=IC, Provided_By="SUBCO with ST control", Status=Released
U7: library part MCD-00086, "Ultra low drop-low noise BiCMOS voltage, regulators low ESR capacitors compatible", Manufacturer=STMICROELECTRONICS, Manufacturer_Part_Number=LD3985M33R, ComponentLink1Description=STM_LDO_LD3985.pdf, ComponentLink1URL=http://tunmcdsvn.tun.st.com/Component_Datasheet_Library/Trunk/IC/STM_LDO_LD3985, ECCN_EU=NEC, ECCN_US=EAR99, Initial_Board_Reference=MB1274, Internal_Part_Number=MCD-00086, Part_Type=IC, Provided_By=Subcon, Status=Released
U8 U9 U10: library part MCD-00170, "ESD protection 6V1", Manufacturer=STMICROELECTRONICS, Manufacturer_Part_Number=ESDALC6V1-1U2, ComponentLink1Description=STM_ESD_ESDALC6V1-1U2.pdf, ComponentLink1URL=http://tunmcdsvn.tun.st.com/Component_Datasheet_Library/Trunk/Diodes/STM_ESD_ESDALC6V1-1U2, ECCN_EU=NEC, ECCN_US=EAR99, Initial_Board_Reference=MB1274, Internal_Part_Number=MCD-00170, Part_Type=Diode, Provided_By=Subcon, Status=Released
U11: library part MCD-00088, "IC REG LDO 5V 0.8A SOT223", Manufacturer=STMICROELECTRONICS, Manufacturer_Part_Number=LD1117S50TR, ComponentLink1Description=STM_LDO_LD1117.pdf, ComponentLink1URL=http://tunmcdsvn.tun.st.com/Component_Datasheet_Library/Trunk/IC/STM_LDO_LD1117, ECCN_EU=NEC, ECCN_US=EAR99, Initial_Board_Reference=MB1274, Internal_Part_Number=MCD-00088, Part_Type=IC, Provided_By=Subcon, Status=Released
U12: library part MCD-00215, "Low quiescent current and low noise voltage regulators", Manufacturer=STMICROELECTRONICS, Manufacturer_Part_Number=LD39050PU33R, ComponentLink1Description=STM_LDO_LD39050PU.pdf, ComponentLink1URL=http://tunmcdsvn.tun.st.com/Component_Datasheet_Library/Trunk/IC/STM_LDO_LD39050PU, ECCN_EU=NEC, ECCN_US=EAR99, Initial_Board_Reference=MB1319, Internal_Part_Number=MCD-00215, Part_Type=IC, Provided_By=Subcon, Status=Released
U13: library part MCD-01243, "STM32G474, LQFP64 package,  3D IC footprint with 2D socket footprint.", Manufacturer=STMICROELECTRONICS, Manufacturer_Part_Number=STM32G474RET6, Package=LQFP64, ComponentLink1Description=Datasheet, ComponentLink1URL=http://tunmcdsvn.tun.st.com/Component_Datasheet_Library/Trunk/IC/STM_MCU_STM32G4xx, Initial_Board_Reference=MB1367, Internal_Part_Number=MCD-01243, Item Type=Item, Part_Type=IC, Path=ws/MCD_ApplicationBoards/Lists/MCDPARTSdatabase, Provided_By="SUBCO with ST control", Status=Checked
U14: library part MCD-01157, "Programmable voltage reference", Manufacturer=STMICROELECTRONICS, Manufacturer_Part_Number=TL1431ACL5T, Package=SOT23-5L, ComponentLink1Description=STM_voltage_reference_TL1431ACL5T.pdf, ComponentLink1URL=http://tunmcdsvn.tun.st.com/Component_Datasheet_Library/Trunk/IC/STM_voltage_reference_TL1431ACL5T/, ECCN_EU=NEC, ECCN_US=EAR99, Initial_Board_Reference=MB1397, Internal_Part_Number=MCD-01157, Part_Type=IC, Provided_By=STM, Status=Checked
X1: library part MCD-00597, "Oscillator 25.00Mhz, -+50PPM, 3.3V, Temp -55 to +125°C", Alternate_Manufacturer="AVX CORP/KYOCERA CORP", Alternate_Manufacturer_Part_Number=KC2520B25.0000C10E00, Manufacturer=NDK, Manufacturer_Part_Number="NZ2520SB 25MHz END4869B", ComponentLink1Description=NDK_OSCILLATOR_NZ2520SB.pdf, ComponentLink1URL=http://tunmcdsvn.tun.st.com/Component_Datasheet_Library/Trunk/Crystal_Osc/NDK_OSCILLATOR_NZ2520SB, ECCN_EU=n/a, ECCN_US=n/a, Initial_Board_Reference=MB1331, Internal_Part_Number=MCD-00597, Order_Code_Digikey=478-4780-1-ND, Part_Type=Crystal_Osc, Provided_By=STM, Status="Footprint available"
X2: library part MCD-00091, "Crystal 32.768kHz, 6pF, -+20PPM, R=50K, SMD", Manufacturer=NDK, Manufacturer_Part_Number="NX3215SA 32.768KHz EXS00A-MU00525", ComponentLink1Description="NDK_Crystal-For-ST_NX3215SA 32.768KHz EXS00A-MU00525 (EXS10B-21238).pdf", ComponentLink1URL="http://tunmcdsvn.tun.st.com/Component_Datasheet_Library/Trunk/Crystal_Osc/NDK_Crystal-For-ST_NX3215SA 32.768KHz EXS00A-MU00525 (EXS10B-21238)", ECCN_EU=NEC, ECCN_US=EAR99, Initial_Board_Reference=MB1274, Internal_Part_Number=MCD-00091, Part_Type=Crystal_Osc, Provided_By=STM, Status=Released
X3: library part MCD-01036, "24MHz crystal oscillator - Cl:6pf -", Manufacturer=NDK, Manufacturer_Part_Number="NX2016SA 24MHz EXS00A-CS10820", Package="(2016) 2.0 x 1.6 x 0.45 mm", ComponentLink1Description="ST-MICROELECTRONICS NX2016SA 24MHz EXS00A-CS10820  (EXS10B-27366).pdf", ComponentLink1URL="http://tunmcdsvn.tun.st.com/Component_Datasheet_Library/Trunk/Crystal_Osc/NDK_NX2016SA 24MHz EXS00A-CS10820 (EXS10B-27366)", ECCN_EU=NEC, ECCN_US=EAR99, Initial_Board_Reference=MB1332, Internal_Part_Number=MCD-01036, Part_Type=Crystal_Osc, Provided_By=Subcon, Status="Footprint available"

## Free pads (board coordinates)
  round 3.2 hole 3.2 unplated: 0(10.87,54.57) 0(43.89,2.5) 0(59.13,53.3)

## Via types
v1: diameter 0.45, hole 0.2, Top Layer to Bottom Layer, tented both sides, 920 vias

## Nets (pads, with @x,y where several pads share a name; then routed paths per layer and width w, separated by ;. In a path a pad name is that pad's centre, name@x,y a point inside that pad or via, vN(x,y) a via of type N, cw(c..) or ccw(c..) an arc to the next point about the centre after c; other vN are vias at no path point)
3V3: CN4.3 CN6.4 CN7.16 JP6.1 R19.2 R25.1 SB5.2 SB39.1 | length 88.7
  Top Layer w0.3: v1(6.35,68.495) v1@6.36,68.505 ; v1(35.425,56.325) 35.425,56.6 35.7,56.875 v1(36.375,56.875) 36.375,56.195 R25.1@36.345,56.165 35.585,56.165 v1(35.425,56.325) ; 36.675,62.65 36.85,62.475 v1(37.3,62.475) v1(37.3,63.4) R19.2@36.675,63.4 36.675,62.65
  Top Layer w0.5: v1(5.15,68.5) v1(5.75,68.5) 5.755,68.495 v1(6.35,68.495) ; v1@6.36,68.505 CN4.3@8.363,68.505
  Top Layer w1.5: CN7.16@5.79,32.98 CN6.4@10.87,32.98
  Signal Layer 2 w0.5: v1(5.15,68.5) v1(5.75,68.5) 6.345,68.5 v1(6.35,68.495) 9.105,68.495 10.175,67.425 13.475,67.425 24.575,56.325 v1(35.425,56.325) 35.825,56.325 v1(36.375,56.875) 37.3,57.8 v1(37.3,62.475) v1(37.3,63.4)
  Signal Layer 2 w1.5: CN7.16@5.79,32.98 CN6.4@10.87,32.98
  Bottom Layer w0.3: 4.4,32.15 4.96,32.15 CN7.16@5.79,32.98 ; 9.65,32.15 10.04,32.15 CN6.4@10.87,32.98 ; 34.9,42.45 34.9,41.97 JP6.1@35.635,41.235 34.925,40.525 34.925,39.625
  Bottom Layer w0.5: v1(5.15,68.5) v1(5.75,68.5) 5.753,68.498 6.347,68.498 v1(6.35,68.495) ; 11.65,36.875 12.425,36.875 12.45,36.85 ; v1(35.425,56.325) 35.825,56.325 v1(36.375,56.875) ; JP6.1@35.635,41.235 37.965,41.235 SB5.2@37.97,41.24 ; v1(37.3,62.475) v1(37.3,63.4)
  Bottom Layer w0.6: 11.875,33.875 12.3,34.3 12.3,35.425 12.45,35.575
  Bottom Layer w0.8: CN7.16@5.79,32.98 CN6.4@10.87,32.98 10.98,32.98 11.875,33.875 ; 12.45,35.575 12.45,36.85 14.3,36.85 14.875,36.85 SB39.1@15.325,37.3
3V3_STLK: C6.2 C7.2 C8.2 C9.2 C13.2 C14.2 C15.2 C16.2 C17.2 C18.2 C21.2 C22.2 C23.2 C24.2 C25.2 C26.2 C27.2 C28.2 C29.2 C31.2 C32.2 C33.2 CN2.1 LD1.4 R14.1 R24.1 U5.C1 U5.C5 U5.C7 U5.C8 U5.C9 U5.F3 U5.G3 U5.G13 U5.H13 U5.J12 U5.J13 U5.K4 U5.N8 U5.N9 U5.N10 U5.P1 U5.R1 U7.5 X1.4 | length 200.2
  Top Layer w0.15: 24.55,68.325 24.805,68.07 26.12,68.07 U5.C8@26.45,68.4 ; 24.65,65.95 24.825,66.125 26.125,66.125 U5.C5@26.45,66.45 ; 24.65,68.95 24.875,68.725 26.125,68.725 U5.C9@26.45,69.05 ; 24.725,67.35 24.805,67.43 26.13,67.43 U5.C7@26.45,67.75 ; 27.275,63.35 27.43,63.505 27.43,64.633 27.617,64.82 28.07,64.82 U5.F3@28.4,65.15 ; U5.G3@29.05,65.15 29.37,64.83 29.845,64.83 30.025,64.65 30.025,63.575 30.2,63.4 ; U5.J12@30.35,71 30.67,71.32 31.773,71.32 31.98,71.527 31.98,73.23 32.175,73.425 ; U5.K4@31,65.8 30.68,65.48 30.68,64.367 30.877,64.17 31.783,64.17 31.975,63.978 31.975,63.4 ; U5.N8@32.95,68.4 33.27,68.08 34.745,68.08 ; U5.N9@32.95,69.05 33.275,68.725 34.75,68.725 ; U5.N10@32.95,69.7 33.275,69.375 34.725,69.375
  Top Layer w0.16: 26.775,73.2 26.775,73.085 26.775,72.775 26.925,72.625 28.5,72.625 ; 28.535,72.625 28.625,72.625 28.725,72.525 28.725,72.165 28.725,71.975 U5.G13@29.05,71.65 ; 29.1,73.375 29.375,73.1 29.375,71.975 U5.H13@29.7,71.65 ; 29.825,73.5 30.025,73.3 30.025,71.975 U5.J13@30.35,71.65
  Top Layer w0.25: U5.P1@33.6,63.85 33.6,63.375 34.175,62.8 C26.2@34.175,62.325 ; U5.R1@34.25,63.85 34.25,63.5 C27.2@35.425,62.325
  Top Layer w0.3: v1(22.1,65.9) R14.1@22.725,65.9 ; v1(23.175,64.325) 23.625,64.775 C21.2@23.625,64.925 24.175,64.925 24.45,65.2 24.45,65.75 24.65,65.95 ; v1(23.175,66.625) 23.625,67.075 C17.2@23.625,67.225 24.6,67.225 24.725,67.35 ; v1(23.175,68.225) 23.625,68.675 C15.2@23.625,68.825 24.05,68.825 24.55,68.325 ; v1(23.175,69.475) C13.2@23.625,69.925 ; C28.2@23.35,62.25 v1(23.35,62.9) ; C13.2@23.675,69.925 C13.2@23.625,69.925 ; 24.65,68.95 24.225,69.375 24.225,69.85 24,70.075 C13.2@23.625,70.075 C13.2@23.625,69.925 ; C29.2@24.7,62.25 v1(24.7,62.9) ; v1(24.7,74.475) C6.2@25.35,74.475 25.35,73.625 25.625,73.35 26.625,73.35 26.775,73.2 ; v1(26.425,61.875) 25.975,62.325 C22.2@25.825,62.325 25.825,62.825 26.45,63.45 U5.C1@26.45,63.85 ; v1(27.05,74.925) 27.5,74.475 C7.2@27.65,74.475 ; 27.275,63.35 27.075,63.15 C23.2@27.075,62.325 27.225,62.325 v1(27.675,61.875) ; C7.2@27.65,74.45 27.7,74.45 28.375,73.775 28.7,73.775 29.1,73.375 ; v1(27.875,57.925) C32.2@27.875,58.55 X1.4@29.05,58.55 ; v1(28.3,74.925) 28.75,74.475 C8.2@28.9,74.475 28.9,74.4 29.8,73.5 ; 30.2,63.4 30.625,62.975 C24.2@30.625,62.325 30.775,62.325 v1(31.225,61.875) ; R24.1@31.55,59.45 v1(32.275,59.45) ; 31.975,63.4 31.875,63.3 C25.2@31.875,62.325 32.025,62.325 v1(32.475,61.875) ; v1(32.05,74.925) 32.65,74.325 C9.2@32.65,74.15 32.65,73.9 32.175,73.425 ; C26.2@34.175,62.325 34.325,62.325 v1(34.775,61.875) ; 34.725,69.375 35.725,69.375 C14.2@35.775,69.425 35.775,69.275 v1(36.225,68.825) ; 34.745,68.08 35.775,67.05 C18.2@35.775,66.925 35.775,66.775 v1(36.225,66.325) ; 34.75,68.725 35.225,68.725 C16.2@35.775,68.175 35.775,68.025 v1(36.225,67.575) ; v1(35.238,58.825) v1(35.975,58.825) 47.23,58.825 C33.2@47.13,58.925 C31.2@47.13,60.05 U7.5@47.13,61.575 ; C27.2@35.425,62.325 35.575,62.325 v1(36.025,61.875) ; v1(57.06,80.04) v1@57.065,80.04 ; LD1.4@58.12,80.04 v1@57.065,80.04 ; LD1.4@58.125,79.45 v1(57.065,79.45) v1@57.065,80.04 ; LD1.4@58.125,80.625 v1(57.065,80.625) v1@57.065,80.04
  Signal Layer 2 w0.3: CN2.1@11.19,80.04 11.335,80.04 16.2,75.175 24,75.175 v1(24.7,74.475) v1@24.7,74.375 ; v1(22.1,65.9) 23.15,65.9 23.175,65.875 ; v1(27.875,57.925) 28.6,58.65 ; v1(31.225,61.875) v1(32.475,61.875) ; 37.425,76.125 37.425,71.45 36.225,70.25 ; 41.34,80.04 v1(57.06,80.04) ; 23.175,65.875 v1(23.175,66.625) v1(23.175,68.225) v1(23.175,69.475) 23.175,72.85 v1@24.7,74.375 ; 23.175,65.875 v1(23.175,64.325) 23.175,63.075 v1(23.35,62.9) v1(24.7,62.9) 25.725,61.875 v1(26.425,61.875) v1(27.675,61.875) 27.785,61.765 27.785,61.335 28.6,60.52 28.6,58.65 ; v1@24.7,74.375 25.25,74.925 v1(27.05,74.925) v1(28.3,74.925) v1(32.05,74.925) 32.575,74.4 32.575,72.925 33.025,72.475 34,72.475 36.225,70.25 ; 28.6,58.65 31.475,58.65 v1(32.275,59.45) ; v1(32.275,59.45) 33.875,59.45 34.5,58.825 v1(35.238,58.825) v1(35.975,58.825) 35.975,61.825 v1(36.025,61.875) ; v1(32.275,59.45) 32.255,59.47 32.255,60.405 32.475,60.625 v1(32.475,61.875) ; v1(32.475,61.875) v1(34.775,61.875) v1(36.025,61.875) ; v1(36.025,61.875) 36.025,66.125 v1(36.225,66.325) v1(36.225,67.575) v1(36.225,68.825) 36.225,70.25
  Bottom Layer w0.5: v1(35.238,58.825) v1(35.975,58.825) ; v1(57.065,79.45) v1(57.065,80.625)
5V: C36.2 C37.2 CN6.5 CN7.18 JP5.2 JP5.4 JP5.6 JP5.8 Q2.3 R7.2 R12.1 R35.2 U12.1 U12.6 | length 186.8
  Top Layer w0.3: C37.2@30.245,46.315 30.46,46.315 30.835,45.94 U12.1@31.42,45.94 ; U12.6@34.02,45.94 C36.2@34.02,47.24 ; v1(39.4,67.325) R12.1@39.4,66.7 v1(40.025,66.7) ; Q2.3@51.37,22.69 Q2.3@51.57,22.49 ; v1@51.57,19.43 v1(51.575,19.435) ; 54.975,67.925 56.015,67.925 JP5.8@56.59,68.5 ; 57.95,69.475 56.975,68.5 JP5.8@56.59,68.5 ; R7.2@58.8,70.85 57.25,70.85 56.59,70.19 JP5.8@56.59,68.5
  Top Layer w0.5: C37.2@30.245,46.315 30.245,47.42 30.9,48.075 33.7,48.075 34.02,47.755 ; C36.2@34.02,47.24 34.02,47.755 ; v1@51.57,19.43 R35.2@51.57,20.44 Q2.3@51.57,22.49 ; v1(56.425,47.775) 56.425,47.75 56.4,47.775 v1(55.775,47.775) v1(54.975,47.775) 53.65,47.775 53.3,48.125 36.015,48.125 35.645,47.755 34.02,47.755
  Top Layer w0.8: v1(16.25,26.3) v1@16.25,26.325 ; v1(17.55,33.7) v1(18.3,33.7) v1(19.125,33.7) 28.4,33.7 33.9,39.2 48.825,39.2 50.35,40.725 v1(53.425,40.725) v1(54.05,40.725) v1(54.8,40.725) ; 15.325,27.25 v1@16.25,26.325 ; 15.325,27.25 v1(16.25,27.25) ; 15.325,27.25 v1(16.25,28.175) v1(16.25,27.25) ; v1@16.25,26.325 v1(16.25,27.25)
  Top Layer w1: CN6.5@10.87,30.44 14.06,27.25 15.325,27.25
  Top Layer w1.5: CN7.18@5.79,30.44 CN6.5@10.87,30.44
  Signal Layer 2 w0.3: v1(51.575,19.435) v1(51.575,21.25) v1(51.575,21.7) 51.575,31.525 53.825,33.775 53.825,35.975 56.425,38.575 56.425,40.725 v1(56.425,47.775) 56.425,60.715 JP5.2@56.59,60.88
  Signal Layer 2 w0.5: v1(55.775,47.775) v1(56.425,47.775)
  Signal Layer 2 w0.8: v1(16.25,26.3) v1(16.25,27.25) v1(16.25,28.175) ; v1(17.55,33.7) v1(18.3,33.7) v1(19.125,33.7) ; v1(54.05,40.725) v1(54.8,40.725) 56.425,40.725
  Signal Layer 2 w1.5: CN7.18@5.79,30.44 CN6.5@10.87,30.44 ; JP5.2@56.59,60.88 JP5.4@56.59,63.42 JP5.6@56.59,65.96 JP5.8@56.59,68.5
  Bottom Layer w0.3: v1(51.575,19.435) v1(51.575,21.25) v1@51.575,21.675
  Bottom Layer w0.5: v1(54.975,47.775) v1(55.775,47.775) v1(56.425,47.775)
  Bottom Layer w0.8: CN7.18@5.79,30.44 5.79,30.335 7,29.125 9.555,29.125 CN6.5@10.87,30.44 ; v1(16.25,26.3) v1(16.25,27.25) v1(16.25,28.175) 16.25,28.5 17.55,29.8 17.55,32.125 ; v1(53.425,40.725) v1(54.05,40.725) v1(54.8,40.725) ; 17.55,32.125 v1(19.125,33.7) v1(18.3,33.7) ; 17.55,32.125 17.55,32.95 ; 17.55,32.95 v1(18.3,33.7) ; 17.55,32.95 v1(17.55,33.7) v1(18.3,33.7)
5V_USB_CHGR: C2.2 C11.2 CN1.1 CN10.8 D1.1 JP5.7 R1.2 R6.2 U3.1 U4.5 | length 143.8
  Top Layer w0.25: v1(51.925,65.675) 53.45,65.675 55.025,67.25 57.88,67.25 JP5.7@59.13,68.5 ; 57.875,67.675 57.875,68.275 58.475,68.875 58.755,68.875 JP5.7@59.13,68.5 ; 60.675,68.425 60.675,68.95 60.325,69.3 59.575,69.3 59.13,68.855 JP5.7@59.13,68.5
  Top Layer w0.3: CN1.1@36.3,78.35 36.3,77.82 37.18,76.94 ; v1(39.235,73.49) 39.235,73.553 39.172,73.49 38.185,73.49 37.33,74.345 37.33,75.64 37.215,75.64 37.225,75.65 C2.2@37.225,76.845 ; v1(45.675,71.725) 45.685,71.735 R6.2@45.685,72.57 ; v1(48.533,78.158) R1.2@48.533,78.98 ; U4.5@49.125,71.395 50.08,71.395 50.455,71.02 C11.2@50.635,71.02 51.52,71.02 v1(51.525,71.025) ; v1(49.815,65.675) D1.1@50.87,65.675 ; v1(50.87,65.075) D1.1@50.87,65.675 ; v1(50.87,66.275) D1.1@50.87,65.675 ; v1(51.925,65.675) D1.1@50.87,65.675 ; 37.18,76.94 37.225,76.895 C2.2@37.225,76.845 ; 37.18,76.94 37.18,76.89 C2.2@37.225,76.845
  Signal Layer 2 w0.3: JP5.7@59.13,68.5 59.13,69.895 58,71.025 v1(51.525,71.025) 51.525,69.075 52.05,68.55 52.05,65.8 v1(51.925,65.675) 51.325,65.075 v1(50.87,65.075) 50.415,65.075 v1(49.815,65.675) 45.675,69.815 v1(45.675,71.725) 41,71.725 v1(39.235,73.49) 39.235,73.91 43.483,78.158 v1(48.533,78.158) 59.117,78.158 67.275,70 67.275,68.5
  Signal Layer 2 w0.8: JP5.7@59.13,68.5 67.275,68.5 68.3,67.475 68.3,44.69 CN10.8@66.75,43.14
  Bottom Layer w0.25: JP5.7@59.13,68.5 57.88,67.25 55.025,67.25 53.45,65.675 v1(51.925,65.675) ; v1(51.925,65.675) 51.325,65.075 v1(50.87,65.075) 50.415,65.075 v1(49.815,65.675) 50.415,66.275 v1(50.87,66.275) 51.325,66.275 v1(51.925,65.675)
5V_USB_STLK: C5.2 JP5.1 U4.1 | length 47.8
  Top Layer w0.3: C5.2@49.46,74.885 C5.2@49.46,75.12
  Top Layer w0.5: C5.2@49.46,74.885 49.125,74.55 U4.1@49.125,73.595 49.92,73.595 49.95,73.625 ; C5.2@49.46,75.12 49.46,76.06 v1(50.865,76.06) 54.3,72.625 v1(60.425,72.625) v1(60.9,72.625) v1(61.375,72.625)
  Signal Layer 2 w0.5: v1(49.475,76.045) 49.48,76.05 v1(50.2,76.05) 50.21,76.06 v1(50.865,76.06) ; v1(60.425,72.625) v1(60.9,72.625) v1(61.375,72.625)
  Bottom Layer w0.5: v1(49.475,76.045) 50.195,76.045 v1(50.2,76.05) 50.855,76.05 v1(50.865,76.06) 56.99,76.06 v1(60.425,72.625) v1(60.9,72.625) v1(61.375,72.625) 61.375,61.525 60.73,60.88
  Bottom Layer w1: JP5.1@59.13,60.88 59.13,59.32 59.275,59.175
  Bottom Layer w1.5: JP5.1@59.13,60.88 60.73,60.88
5V_VIN: C38.2 D3.1 JP5.3 R30.2 U11.2 U11.4 | length 107.8
  Top Layer w0.25: v1(51.925,61.675) 54.55,61.675 55.005,62.13 57.84,62.13 JP5.3@59.13,63.42 59.13,63.73 59.616,64.216 60.416,64.216 60.425,64.225
  Top Layer w0.3: v1(49.815,61.675) D3.1@50.87,61.675 ; v1(50.87,61.075) D3.1@50.87,61.675 ; v1(50.87,62.275) D3.1@50.87,61.675 ; v1(51.925,61.675) D3.1@50.87,61.675 ; 57.84,62.13 57.84,62.842 57.865,62.867 57.865,63.703 58.17,64.008 58.542,64.008 JP5.3@59.13,63.42
  Top Layer w0.5: v1(15.275,40.625) v1@15.265,40.615 ; v1(21.1,42.525) 21,42.625 15.675,42.625 15.265,42.215 15.265,41.575 ; v1(21.1,44.7) 20.625,44.225 14.925,44.225 14.285,43.585 ; 13.25,41.575 R30.2@13.25,43.575 14.275,43.575 14.285,43.585 ; 13.25,41.575 13.25,40.975 13.61,40.615 14.295,40.615 ; 13.25,41.575 14.265,41.575 v1(14.285,41.595) ; v1(14.285,41.595) 14.285,43.585 ; v1(14.285,41.595) 15.245,41.595 15.265,41.575 ; v1(14.285,41.595) 14.295,41.585 14.295,40.615 ; 14.295,40.615 14.295,39.645 v1(14.305,39.635) 15.035,39.635 15.265,39.865 v1@15.265,40.615 ; 14.295,40.615 v1@15.265,40.615 ; v1@15.265,40.615 15.265,41.575
  Top Layer w0.8: C38.2@17.47,43.665 19.545,43.665 U11.2@19.595,43.615
  Top Layer w1.2: U11.2@19.595,43.615 v1(21.1,43.615) U11.4@25.945,43.615
  Signal Layer 2 w0.25: 26.3,44.55 26.445,44.695 32.35,44.695 32.525,44.52 37.795,44.52 50.325,57.05 50.325,60.53 v1(50.87,61.075)
  Signal Layer 2 w1.2: v1(21.1,43.615) 21.115,43.6 v1(22.325,43.6) v1(23.55,43.6) 24.175,43.6
  Bottom Layer w0.25: 57.875,63.713 58.093,63.931 58.619,63.931 JP5.3@59.13,63.42 57.88,62.17 55.045,62.17 54.55,61.675 v1(51.925,61.675) ; v1(51.925,61.675) 51.325,61.075 v1(50.87,61.075) 50.415,61.075 v1(49.815,61.675) 50.415,62.275 v1(50.87,62.275) 51.325,62.275 v1(51.925,61.675)
  Bottom Layer w1.2: v1(21.1,43.615) 21.115,43.6 v1(22.325,43.6) v1(23.55,43.6) 24.175,43.6
  other v1: 24.275,40.375 21.85,40.4 26.55,40.425 25.575,41.225 21.525,41.375 22.875,42.025 24.45,42.125 24.475,44.575 22.85,44.85 25.5,46.05 22.825,46.075 21.575,47.075 26.675,47.1 24.075,47.125
AGND: C43.1 C44.1 C46.1 C47.1 C48.2 C49.2 C50.1 CN10.32 R34.1 SB11.2 U13.27 U14.5 | length 107.7
  Top Layer w0.2: 45.25,26.5 45.835,26.5 C46.1@45.92,26.415
  Top Layer w0.25: C49.2@41.72,24.94 41.88,25.1 42.5,25.1 42.55,25.05 42.55,24.735 C48.2@42.845,24.44 ; 43.85,25.125 44.335,25.125 C47.1@44.445,25.015 ; 57.575,11.4 65.49,11.4 ; 57.625,8.85 67.425,8.85
  Top Layer w0.3: v1(36.9,25.325) 36.915,25.34 40.81,25.34 41.21,24.94 C49.2@41.72,24.94 41.72,24.44 C48.2@42.845,24.44 43.87,24.44 C47.1@44.445,25.015 v1(45.15,25.015) 45.87,25.015 C50.1@45.92,24.965 ; C43.1@42.87,31.49 42.95,31.57 43.995,31.57 C44.1@43.995,30.99 ; U14.5@45.42,21.84 45.42,22.765 45.92,23.265 R34.1@45.92,23.49 C50.1@45.92,24.965 ; C46.1@45.92,26.415 C50.1@45.92,24.965
  Top Layer w0.5: v1(44.4,21.825) 44.415,21.84 U14.5@45.42,21.84 ; 57.575,11.4 v1(45.225,11.4) v1(44.4,11.4) v1(44.4,10.5) v1(44.4,9.5) 45.05,8.85 57.625,8.85 ; 65.49,11.4 CN10.32@66.75,12.66 68.35,11.06 68.35,9.6 67.6,8.85 67.425,8.85
  Signal Layer 2 w0.5: v1(44.4,9.5) v1(45.25,9.5) ; v1(44.4,10.5) v1(45.225,10.5) ; v1(44.4,11.4) v1(45.225,11.4)
  Bottom Layer w0.3: v1(36.9,25.325) 38.4,25.325 38.4,25.7 SB11.2@38.36,25.74
  Bottom Layer w0.5: v1(44,31.575) 44.825,31.575 47.15,29.25 47.15,27.015 v1(45.15,25.015) 44.4,24.265 v1(44.4,21.825) 44.4,12.225 ; v1@45.225,9.45 v1@45.225,9.5 ; v1(45.25,9.5) v1@45.225,9.5 ; v1(44.4,11.4) v1(44.4,10.5) v1(44.4,9.5) v1@45.225,9.5 ; v1(44.4,11.4) v1(45.225,11.4) ; v1(44.4,11.4) 44.4,12.225 ; 44.4,12.225 v1(45.225,11.4) ; v1@45.225,9.5 v1(45.225,10.5) v1(45.225,11.4)
  other v1: 43.55,21.775 42.2,23 43.525,23
ARD_D0_RX: CN9.1 CN10.37 SB19.2 SB22.2 | length 37.9
  Top Layer w0.12: v1(40.175,18.375) 41.936,18.375 45.361,14.95 52.1,14.95 52.1,14.928 v1(52.103,14.926) ; v1(52.075,5.05) 52.085,5.04 CN9.1@59.13,5.04 CN10.37@64.21,5.04
  Bottom Layer w0.12: SB19.2@39.195,19.915 SB22.2@39.195,18.365 40.165,18.365 v1(40.175,18.375) ; v1(52.075,5.05) 52.076,14.926 v1(52.103,14.926)
ARD_D1_TX: CN9.2 CN10.35 SB13.2 SB18.2 | length 44.5
  Top Layer w0.12: v1(32.835,22.14) 34.36,22.14 36.9,19.6 41.05,19.6 45.3,15.35 v1(52.6,15.35) ; v1(52.6,7.575) 59.125,7.575 CN9.2@59.13,7.58 CN10.35@64.21,7.58
  Bottom Layer w0.12: v1(32.835,22.14) SB18.2@33.87,22.14 SB13.2@33.87,23.69 ; v1(52.6,7.575) v1(52.6,15.35)
AVDD: C43.2 C44.2 L1.2 SB8.2 U13.29 | length 9.2
  Top Layer w0.3: U13.29@38.36,26.34 39.7,26.34 v1(41.925,28.565) ; C43.2@42.845,30.065 C43.2@42.87,30.09
  Top Layer w0.45: v1(41.925,28.565) L1.2@42.845,28.565
  Top Layer w0.5: L1.2@42.845,28.565 C43.2@42.845,30.065 ; C43.2@42.87,30.09 C44.2@43.995,30.09
  Bottom Layer w0.5: v1(41.925,28.565) SB8.2@43.045,28.565
B_USER: C35.2 R27.2 SB16.1 SB21.1 | length 60.7
  Top Layer w0.12: v1(18.001,49.027) 18.003,49.025 18.045,49.025 18.3,49.28 27.031,49.28 28.281,48.03 29.517,48.03 30.047,48.56 34.615,48.56 v1(34.8,48.375) ; v1(34.82,51.405) C35.2@34.82,52.14 R27.2@34.82,53.29
  Bottom Layer w0.12: v1(18.001,49.027) 20.749,49.027 21.17,48.606 21.17,47.379 20.32,46.529 20.32,42.65 21.075,41.895 21.075,38.1 21.665,37.51 21.665,30.96 23.025,29.6 23.025,26.35 23.755,25.62 23.755,23.547 24.21,23.092 24.21,21.725 23.96,21.475 SB16.1@23.35,21.475 23.35,21.275 22.675,20.6 22.007,20.6 20.98,19.573 20.98,19.13 20.3,18.45 SB21.1@20.3,18.25 ; v1(34.8,48.375) 34.8,48.45 34.82,48.47 v1(34.82,51.405)
E5V: CN7.6 D2.1 JP5.5 | length 90.6